# Altium PCB 683557.PCBDOC
Units mil, origin at the board's own origin, x right, y up, seen from the top; angles counter-clockwise.
Board outline 3090.55 x 1732.28 mil, 2 copper layers (Top Layer, Bottom Layer); 110 components, 0 nets, 218 pads, 47 vias.
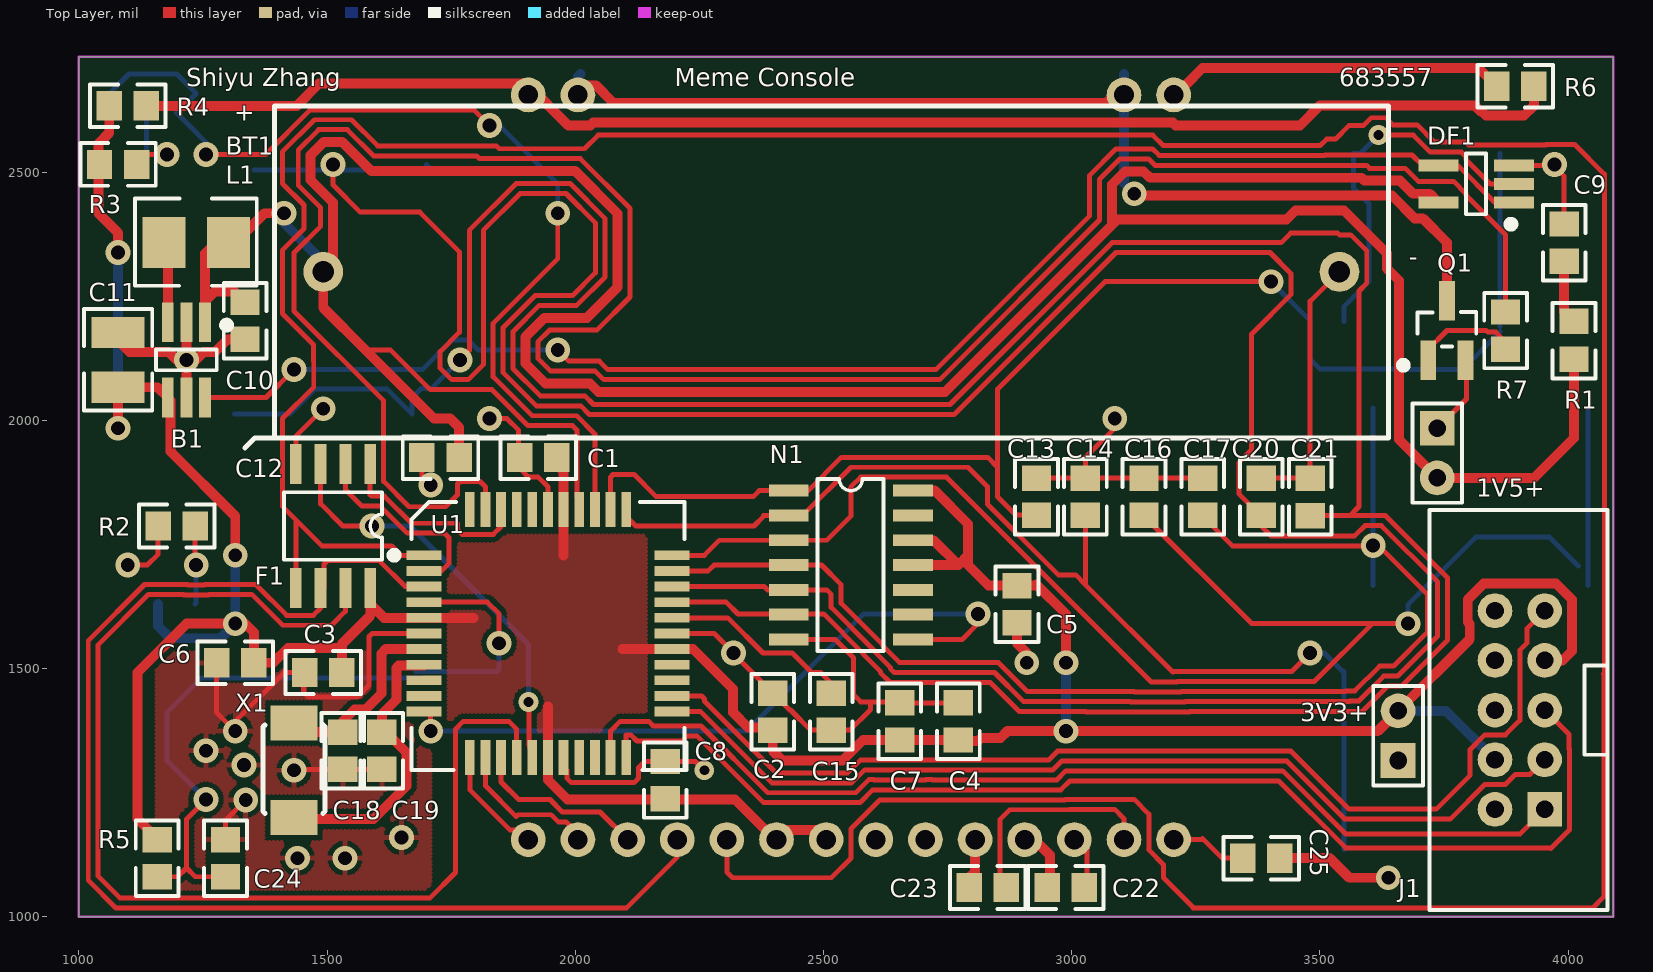
[diagram p0: Top Layer view]
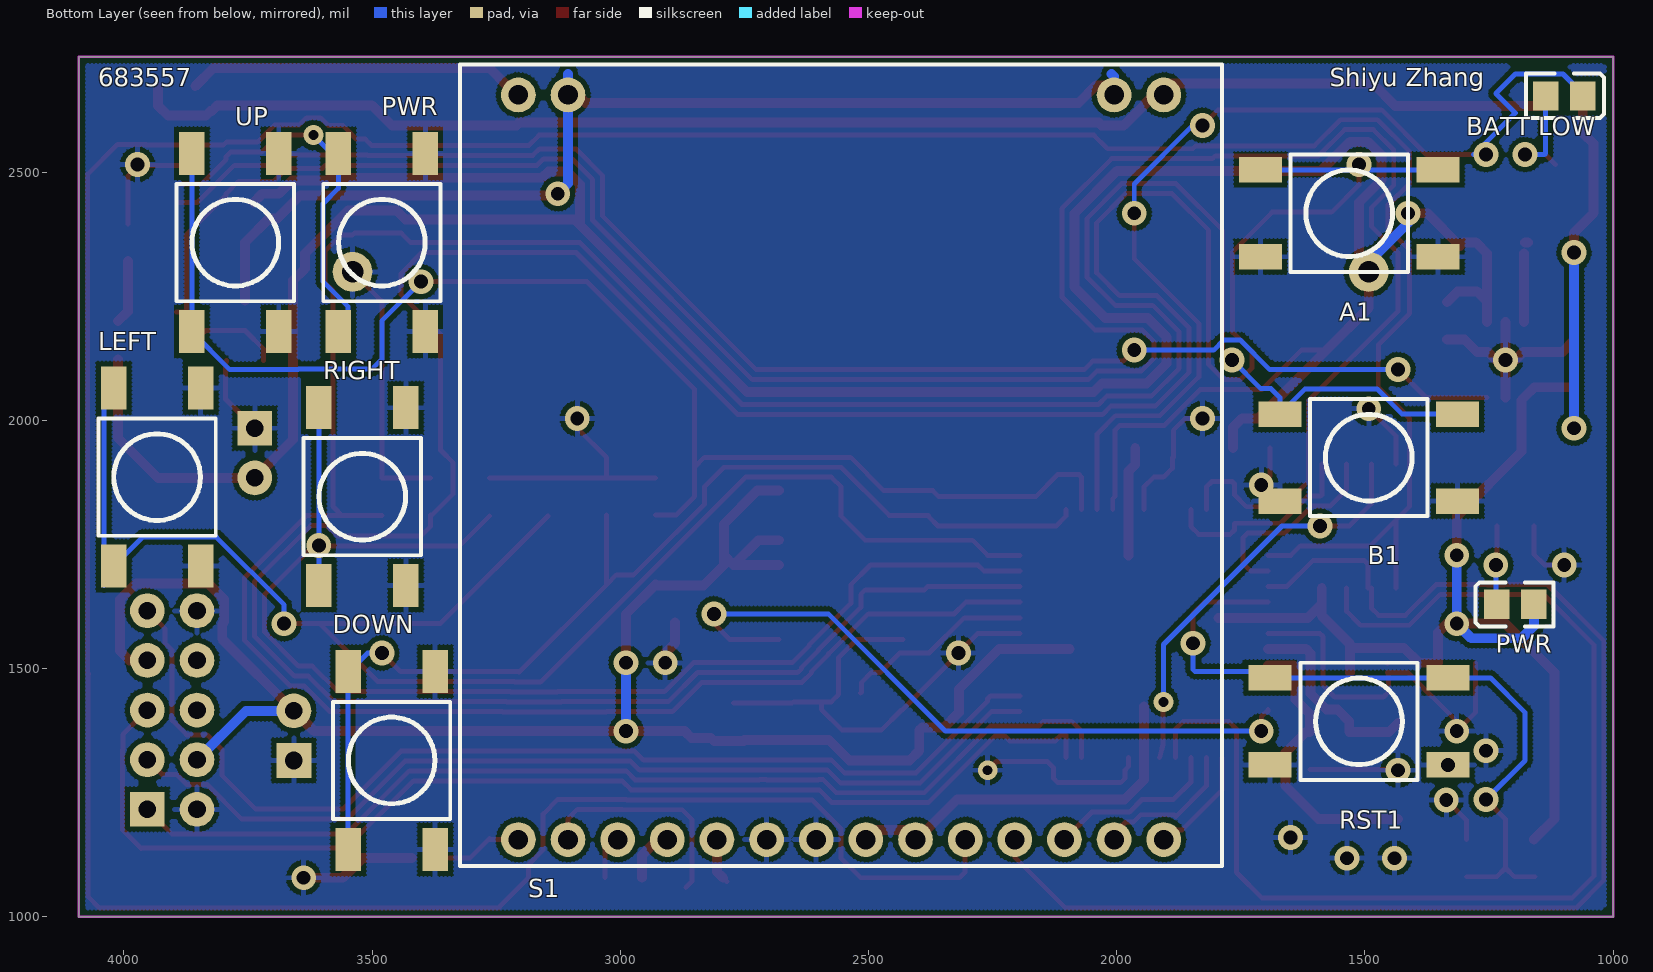
[diagram p1: Bottom Layer view, seen from below]

## Layer stack, top to bottom
Top Layer: signal copper 1.4
Dielectric: dielectric 12.6, FR-4, Dk 4.8
Bottom Layer: signal copper 1.4

## Board outline
1000,1000 4090.55,1000 4090.55,2732.28 1000,2732.28

## Components (designator, comment, footprint, x,y, rotation, side; value= is the part's Value field where it differs from the comment)
1V5+ "Func" HDR1X2 3736.22,1984.25 r270 top (schematic designator "VBATT Header1")
3V3+ "Func" HDR1X2 3657.48,1314.96 r90 top (schematic designator "VCC Header1")
A1 "A" SPNO_SMD 1531.5,2417.32 r180 bottom
B1 "SC120" SOT23-6 1216.54,2122.05 r270 top (schematic designator "Boost converter1")
B1 "B" SPNO_SMD 1492.13,1925.2 r180 bottom
"BATT LOW" "BAT_LOW_LED" 0805D 1098.43,2653.54 r0 bottom (schematic designator D2)
BT1 "1.5v" BATT_HOLDER 2515.75,2299.21 r180 top
C1 "100nF" 0805#1 1925.2,1925.2 r180 top
C2 "100nF" 0805#1 2397.64,1413.39 r90 top
C3 "100nF" 0805#1 1492.13,1492.13 r180 top
C4 "100nF" 0805#1 2771.65,1393.7 r90 top
C5 "100nF" 0805#1 2889.76,1629.92 r270 top
C6 "100nF" 0805#1 1314.96,1511.81 r180 top
C7 "100nF" 0805#1 2653.54,1393.7 r90 top
C8 "100nF" 0805#1 2181.1,1275.59 r90 top
C9 "100nF" 0805#1 3992.13,2358.27 r90 top
C10 "1uF" 0805#1 1334.65,2200.79 r270 top
C11 "22uF" 1210 1078.74,2122.05 r90 top
C12 "1uF" 0805#1 1728.35,1925.2 r180 top
C13 "100nF" 0805#1 2929.13,1846.46 r90 top
C14 "100nF" 0805#1 3027.56,1846.46 r90 top
C15 "100nF" 0805#1 2515.75,1413.39 r90 top
C16 "100nF" 0805#1 3145.67,1846.46 r90 top
C17 "100nF" 0805#1 3263.78,1846.46 r90 top
C18 "18pF" 0805#1 1531.5,1334.65 r270 top
C19 "18pF" 0805#1 1610.24,1334.65 r270 top
C20 "100nF" 0805#1 3381.89,1846.46 r90 top
C21 "100nF" 0805#2 3480.31,1846.46 r90 top
C22 "100nF" 0805#1 2988.19,1059.06 r0 top
C23 "100nF" 0805#1 2830.71,1059.06 r0 top
C24 "100nF" 0805#1 1295.28,1118.11 r90 top
C25 "100nF" 0805#1 3381.89,1118.11 r0 top
DF1 "74AUG1G80" SOT23-5 3814.96,2476.38 r180 top (schematic designator "D Flip Flop")
DOWN "DOWN" SPNO_SMD 3460.63,1314.96 r90 bottom (schematic designator DOWN1)
F1 "FM25L04B" SOIC-8 1511.81,1787.4 r270 top (schematic designator FRAM1)
J1 "JTAG" BOXEDVERT10 3952.76,1216.54 r90 top
L1 "4.7uH" 1210L 1236.22,2358.27 r0 top
LEFT "LEFT" SPNO_SMD 3933.07,1885.83 r90 bottom (schematic designator LEFT1)
N1 "74AHC30" SOIC-14 2555.12,1708.66 r0 top (schematic designator NAND1)
PWR "POWER LED" 0805D 1196.85,1629.92 r180 bottom (schematic designator D1)
PWR "Power button" SPNO_SMD 3480.32,2358.27 r90 bottom (schematic designator "Power button1")
Q1 "RTR025N03TL" SOT23 3755.91,2181.1 r90 top
R1 "10k" 0805#3 4011.81,2160.43 r270 top
R2 "220" 0805#1 1196.85,1787.4 r180 top
R3 "10k" 0805#1 1078.74,2515.75 r0 top
R4 "15k" 0805#1 1098.43,2633.86 r0 top
R5 "10k" 0805#1 1157.48,1118.11 r270 top
R6 "10k" 0805#1 3893.7,2673.23 r0 top
R7 "15" 0805#1 3874.02,2181.1 r90 top
RIGHT "RIGHT" SPNO_SMD 3519.68,1846.46 r90 bottom (schematic designator RIGHT1)
RST1 "RESET" SPNO_SMD 1511.81,1393.7 r180 bottom (schematic designator RESET_BTN1)
S1 "EA DOGS102x-6" "EA DOGS102x" 2555.28,1905.67 r0 bottom (schematic designator LCD)
U1 "ATMEGA16" QFP-48 1944.88,1570.87 r0 top
UP "UP" SPNO_SMD 3775.59,2358.27 r90 bottom (schematic designator UP1)
X1 "7.68Mhz" XTAL_FLAT_SMD 1433.07,1295.28 r270 top
? "" ? 0,0 r0 top
? "" ? 0,0 r0 top
? "" ? 0,0 r0 top
? "" ? 0,0 r0 top
? "" ? 0,0 r0 top
? "" ? 0,0 r0 top
? "" ? 0,0 r0 top
? "" ? 0,0 r0 top
? "" ? 0,0 r0 top
? "" ? 0,0 r0 top
? "" ? 0,0 r0 top
? "" ? 0,0 r0 top
? "" ? 0,0 r0 top
? "" ? 0,0 r0 top
? "" ? 0,0 r0 top
? "" ? 0,0 r0 top
? "" ? 0,0 r0 top
? "" ? 0,0 r0 top
? "" ? 0,0 r0 top
? "" ? 0,0 r0 top
? "" ? 0,0 r0 top
? "" ? 0,0 r0 top
? "" ? 0,0 r0 top
? "" ? 0,0 r0 top
? "" ? 0,0 r0 top
? "" ? 0,0 r0 top
? "" ? 0,0 r0 top
? "" ? 0,0 r0 top
? "" ? 0,0 r0 top
? "" ? 0,0 r0 top
? "" ? 0,0 r0 top
? "" ? 0,0 r0 top
? "" ? 0,0 r0 top
? "" ? 0,0 r0 top
? "" ? 0,0 r0 top
? "" ? 0,0 r0 top
? "" ? 0,0 r0 top
? "" ? 0,0 r0 top
? "" ? 0,0 r0 top
? "" ? 0,0 r0 top
? "" ? 0,0 r0 top
? "" ? 0,0 r0 top
? "" ? 0,0 r0 top
? "" ? 0,0 r0 top
? "" ? 0,0 r0 top
? "" ? 0,0 r0 top
? "" ? 0,0 r0 top
? "" ? 0,0 r0 top
? "" ? 0,0 r0 top
? "" ? 0,0 r0 top
? "" ? 0,0 r0 top
? "" ? 0,0 r0 top
? "" ? 0,0 r0 top
? "" ? 0,0 r0 top
? "" ? 0,0 r0 top

## Footprints (in the part's own frame and the unit in brackets; to place one, negate y for a bottom-side part, rotate by r counter-clockwise, add the part's x,y. Pads: shape width x height; smd on the part's side, far side on the other; paste and mask are expansions set on the pad)
0805#1 [mm] "0805 Footprint"
  rect 1.3x1.5 smd: 1(-0.95,0) 2(0.95,0)
  silkscreen extent -1.93,-1.09 1.93,1.09
0805#2 [mm] "0805 Footprint"
  rect 1.3x1.5 smd: 1(-0.975,-0.002) 2(0.95,0)
  silkscreen extent -1.93,-1.09 1.93,1.09
0805#3 [mm] "0805 Footprint"
  rect 1.3x1.5 smd: 1(0.953,0) 2(-1.006,0)
  silkscreen extent -1.93,-1.09 1.93,1.09
0805D [mm] "0805 Diode"
  rect 1.3x1.5 smd: A(0.95,0) K(-0.95,0)
  silkscreen extent -2.03,-1.14 1.95,1.12
1210 [mm]
  rect 1.6x2.7 smd: 1(-1.4,0) 2(1.4,0)
  silkscreen extent -2.6,-1.75 2.6,1.75
1210L [mm] "Precision Wire Wound Inductor, 2-Leads, Body 3.2x3.2mm, IPC Low Density"
  rect 2.2x2.6 smd: 1(-1.651,0) 2(1.651,0)
  silkscreen extent -3.12,-2.21 3.1,2.26
BATT_HOLDER [mil]
  round 80 hole 43.31: 1(1023.62,0) 2(-1023.62,0)
  silkscreen extent -1122,-335 1122,335
BOXEDVERT10 [mil] "IDC Header 2.54mm Boxed 10 pins"
  rect 70x70 hole 35.43: 1(0,0)
  round 70 hole 35.43: 2(0,100) 3(100,0) 4(100,100) 5(200,0) 6(200,100) 7(300,0) 8(300,100) 9(400,0) 10(400,100)
  silkscreen extent -203,-127 603,232
"EA DOGS102x" [mil] "graphics display footprint"
  round 70 hole 39.37: 1(-650,-750) 2(-550,-750) 13(550,-750) 14(650,-750) 15(650,750) 16(550,750) 17(450,750) 18(350,750) 19(250,750) 20(150,750) 21(50,750) 22(-50,750) 23(-150,750) 24(-250,750) 25(-350,750) 26(-450,750) 27(-550,750) 28(-650,750)
  silkscreen extent -768,-811 768,803
HDR1X2 [mil] "Connector; Header; 2 Position"
  rect 70x70 hole 35.43: 1(0,0)
  round 70 hole 35.43: 2(100,0)
  silkscreen extent -50,-50 150,50
QFP-48 [mm]
  rect 1.8x0.5 smd: 1(-6.35,4) 2(-6.35,3.2) 3(-6.35,2.4) 4(-6.35,1.6) 5(-6.35,0.8) 6(-6.35,0) 7(-6.35,-0.8) 8(-6.35,-1.6) 9(-6.35,-2.4) 10(-6.35,-3.2) 11(-6.35,-4) 23(6.35,-4) 24(6.35,-3.2) 25(6.35,-2.4) 26(6.35,-1.6) 27(6.35,-0.8) 28(6.35,0) 29(6.35,0.8) 30(6.35,1.6) 31(6.35,2.4) 32(6.35,3.2) 33(6.35,4)
  rect 0.5x1.8 smd: 12(-4,-6.35) 13(-3.2,-6.35) 14(-2.4,-6.35) 15(-1.6,-6.35) 16(-0.8,-6.35) 17(0,-6.35) 18(0.8,-6.35) 19(1.6,-6.35) 20(2.4,-6.35) 21(3.2,-6.35) 22(4,-6.35) 34(4,6.35) 35(3.2,6.35) 36(2.4,6.35) 37(1.6,6.35) 38(0.8,6.35) 39(0,6.35) 40(-0.8,6.35) 41(-1.6,6.35) 42(-2.4,6.35) 43(-3.2,6.35) 44(-4,6.35)
  silkscreen extent -8,-6.98 6.98,6.73
SOIC-8 [mil] "SOIC-8 Footprint"
  rect 80x24 smd: 1(-125,75) 2(-125,25) 3(-125,-25) 4(-125,-75) 5(125,-75) 6(125,-25) 7(125,25) 8(125,75)
  silkscreen extent -68,-98 68,98
SOIC-14 [mil] "SOIC-14 Footprint"
  rect 80x24 smd: 1(-125,150) 2(-125,100) 3(-125,50) 4(-125,0) 5(-125,-50) 6(-125,-100) 7(-125,-150)
  rect 80x24.02 smd: 8(125,-150) 9(125,-100) 10(125,-50) 11(125,0) 12(125,50) 13(125,100) 14(125,150)
  silkscreen extent -67,-173 66,173
SOT23 [mil] "SOT23, 3-Leads, Body 3.0x2.5mm (max), Pitch 0.95mm, IPC Low Density"
  rect 80.24x31.5 smd: 1(-60,37.4)
  rect 80x31.5 smd: 2(-60,-37.4) 3(60,0)
  silkscreen extent -75,-59 37,93
SOT23-5 [mm]
  rect 2.032x0.6 smd: 1(-1.929,0.95) 2(-1.929,0) 3(-1.929,-0.95) 4(1.929,-0.95) 5(1.929,0.95)
  silkscreen extent -1.9,-1.55 0.53,2.18
SOT23-6 [mm]
  rect 2.032x0.6 smd: 1(-1.929,0.95) 2(-1.929,0) 3(-1.929,-0.95) 4(1.929,-0.95) 5(1.929,0) 6(1.929,0.95)
  silkscreen extent -1.9,-1.55 0.53,2.18
SPNO_SMD [mm] "SP NO SMD Tactile switch"
  rect 2.2x1.3 smd: 1(-4.55,-2.225) 2(4.55,-2.225) 3(-4.55,2.225) 4(4.55,2.225)
  silkscreen extent -3,-3 3,3
XTAL_FLAT_SMD [mm]
  rect 1.8x2.4 smd: 1(-2.412,0) 2(2.413,0)
  silkscreen extent -2.33,-1.59 2.21,1.6
? [mil]

## Part data
1V5+ 3V3+: library part HDR2, "2 Pin Header"
A1 B1 DOWN LEFT PWR RIGHT RST1 UP: library part SW-PB, "Push Button Switch"
B1: "Regulator Low Voltage"
"BATT LOW": library part "LED RED", "Light Emitting Diode"
BT1: library part BAT, "Battery Holder AA 1.5v"
C1 C2 C3 C4 C5 C6 C7 C8 C9 C10 C12 C13 C14 C15 C16 C17 C18 C19 C20 C21 C22 C23 C24 C25: library part "C 0805", "Capacitor 100nF"
C11: library part "C 1210", "Capacitor 22uF"
DF1: "Inverted single D flip flop"
F1: "FRAM 4Kb Memory"
J1: library part JTAG_CON, "JTAG ATMEL connector"
L1: library part "I 1210", "Inductor 4.7uH"
N1: "1 x 8 Input NAND gate"
PWR: library part "LED GREEN", "Light Emitting Diode"
Q1: library part MOSFET-N, "N-Channel MOSFET"
R1 R2 R3 R4 R5 R6 R7: library part R, "Resistor"
S1: "LCD 102x64-pixel with backlight"
U1: "ATMEGA16 Microcontroller"
X1: library part XTAL, "Crystal Oscillator"

## Via types
v1: diameter 50, hole 28, Top Layer to Bottom Layer, tented both sides, 44 vias
v2: diameter 40, hole 20, Top Layer to Bottom Layer, tented both sides, 3 vias

## Nets (pads, with @x,y where several pads share a name; then routed paths per layer and width w, separated by ;. In a path a pad name is that pad's centre, name@x,y a point inside that pad or via, vN(x,y) a via of type N, cw(c..) or ccw(c..) an arc to the next point about the centre after c; other vN are vias at no path point)
pads on no net: 1V5+.1 1V5+.2 3V3+.1 3V3+.2 "BATT LOW.A" "BATT LOW.K" A1.1 A1.2 A1.3 A1.4 B1.1 B1.2 B1.3 B1.4 B1.5 B1.6 BT1.1 BT1.2 C1.1 C1.2 C2.1 C2.2 C3.1 C3.2 C4.1 C4.2 C5.1 C5.2 C6.1 C6.2 C7.1 C7.2 C8.1 C8.2 C9.1 C9.2 C10.1 C10.2 C11.1 C11.2 C12.1 C12.2 C13.1 C13.2 C14.1 C14.2 C15.1 C15.2 C16.1 C16.2 C17.1 C17.2 C18.1 C18.2 C19.1 C19.2 C20.1 C20.2 C21.1 C21.2 C22.1 C22.2 C23.1 C23.2 C24.1 C24.2 C25.1 C25.2 DF1.1 DF1.2 DF1.3 DF1.4 DF1.5 DOWN.1 DOWN.2 DOWN.3 DOWN.4 F1.1 F1.2 F1.3 F1.4 F1.5 F1.6 F1.7 F1.8 J1.1 J1.2 J1.3 J1.4 J1.5 J1.6 J1.7 J1.8 J1.9 J1.10 L1.1 L1.2 LEFT.1 LEFT.2 LEFT.3 LEFT.4 N1.1 N1.2 N1.3 N1.4 N1.5 N1.6 N1.7 N1.8 N1.9 N1.10 N1.11 N1.12 N1.13 N1.14 PWR.1 PWR.2 PWR.3 PWR.4 PWR.A PWR.K Q1.1 Q1.2 Q1.3 R1.1 R1.2 R2.1 R2.2 R3.1 R3.2 R4.1 R4.2 R5.1 R5.2 R6.1 R6.2 R7.1 R7.2 RIGHT.1 RIGHT.2 RIGHT.3 RIGHT.4 RST1.1 RST1.2 RST1.3 RST1.4 S1.1 S1.2 S1.13 S1.14 S1.15 S1.16 S1.17 S1.18 S1.19 S1.20 S1.21 S1.22 S1.23 S1.24 S1.25 S1.26 S1.27 S1.28 U1.1 U1.2 U1.3 U1.4 U1.5 U1.6 U1.7 U1.8 U1.9 U1.10 U1.11 U1.12 U1.13 U1.14 U1.15 U1.16 U1.17 U1.18 U1.19 U1.20 U1.21 U1.22 U1.23 U1.24 U1.25 U1.26 U1.27 U1.28 U1.29 U1.30 U1.31 U1.32 U1.33 U1.34 U1.35 U1.36 U1.37 U1.38 U1.39 U1.40 U1.41 U1.42 U1.43 U1.44 UP.1 UP.2 UP.3 UP.4 X1.1 X1.2
copper on no net: | length 89453.7
  Top Layer w10: v1(1098.43,1708.66) 1137.8,1708.66 1159.45,1730.32 1159.45,1787.4 ; 1116.14,2515.75 1135.82,2535.43 v1(1177.16,2535.43) ; 1157.48,1080.71 1198.82,1080.71 1216.54,1098.43 ; 1234.25,1787.4 1234.25,1710.63 v1(1236.22,1708.66) ; 1253.94,2046.12 1376.83,2046.12 v1(1433.07,2102.36) ; v1(1255.91,1236.22) 1216.54,1196.85 1216.54,1098.43 ; v1(1255.9,2535.43) 1375.93,2535.43 1466.25,2625.75 1795.51,2625.75 v1(1826.77,2594.49) ; 1277.56,1511.81 1277.56,1411.42 v1(1314.96,1374.02) 1314.96,1393.7 1413.39,1492.13 1454.72,1492.13 1452.76,1490.16 1452.76,1452.76 1462.6,1442.91 1561.02,1442.91 1584.45,1466.34 1584.45,1564.76 1590.55,1570.87 1694.88,1570.87 ; 1295.28,1080.71 1234.25,1080.71 1216.54,1098.43 ; 1295.28,1155.51 1295.28,1194.82 v1(1336,1235.54) ; v1(1433.07,1295.28) 1435.04,1297.24 1531.5,1297.24 1610.24,1297.24 ; 1436.81,1662.4 1436.81,1799.82 ; 1436.81,1912.4 1436.81,1968.31 v1(1492.13,2023.62) ; 1454.72,1510.28 1454.72,1511.81 ; 1486.81,1912.4 1486.81,1832.09 1531.5,1787.4 v1(1590.55,1787.4) ; v1(1511.81,2515.75) 1511.81,2474.46 1566.81,2419.46 1686.84,2419.46 1766.46,2339.84 1766.46,2177.36 1727.71,2138.61 1727.71,2105.48 1751.15,2082.05 1784.28,2082.05 1814.57,2112.33 1814.57,2382.95 1888.94,2457.32 1981.14,2457.32 2040.19,2398.27 2040.19,2297.32 1994.6,2251.73 1919,2251.73 1854.57,2187.3 1854.57,2096.17 1921.33,2029.41 2010.97,2029.41 2028.33,2012.05 2763.13,2012.05 3089.36,2338.27 3399.4,2338.27 3441.57,2296.09 3441.57,2253.32 3362.2,2173.95 3362.2,1940.5 3337.36,1915.66 3337.36,1851.61 3381.89,1807.09 ; 1536.81,1662.4 1536.81,1615.55 1513.12,1591.86 1508.66,1587.4 1410.31,1587.4 1348.11,1649.61 1262.02,1649.61 1261.07,1648.66 1211.37,1648.66 1210.42,1649.61 1140.28,1649.61 1038.74,1548.06 1038.74,1081.86 1083.1,1037.5 1706.79,1037.5 1758.51,1089.21 1758.51,1378.14 1774.06,1393.7 1866.14,1393.7 1881.89,1377.95 1881.89,1320.87 ; 1536.81,1912.4 1536.81,1860.83 1570.24,1827.4 1607.12,1827.4 1661.64,1772.87 1736.53,1772.87 1745.31,1764.09 1745.31,1711.38 1730.79,1696.85 1694.88,1696.85 ; 1577.5,2141.73 1628.03,2141.73 1707.71,2062.05 1832.12,2062.05 1904.76,1989.41 1994.4,1989.41 2003.19,1980.62 2003.19,1847.2 2007.87,1842.52 2007.87,1820.87 ; 1586.81,1912.4 1586.81,1850.2 1589.61,1847.4 1615.4,1847.4 1669.93,1792.87 1762.56,1792.87 1762.56,1779.22 1771.35,1770.43 1834.95,1770.43 1850.39,1785.87 1850.39,1820.87 ; 1690.94,1944.88 1690.94,1887.8 v1(1708.66,1870.08) ; 1694.88,1413.39 1694.88,1417.32 1708.66,1403.54 v1(1708.66,1374.02) v1@1708.66,1393.7 ; 1694.88,1633.86 1822.83,1633.86 1846.46,1610.24 v1(1846.46,1551.18) ; 1694.88,1665.35 1657.07,1665.35 1605.02,1717.4 1500.87,1717.4 1493.81,1710.35 1493.81,1662.4 1486.81,1662.4 1486.81,1622.05 1472.16,1607.4 1418.6,1607.4 1356.39,1669.61 1253.73,1669.61 1252.79,1668.66 1219.65,1668.66 1218.71,1669.61 1132,1669.61 1018.74,1556.35 1018.74,1073.57 1074.81,1017.5 2102.78,1017.5 2205.12,1119.84 2205.12,1175.2 ; 1694.88,1728.35 1648.97,1728.35 1629.92,1747.4 1489.23,1747.4 1436.81,1799.82 ; v1(1767.71,2122.05) 1786.46,2140.79 1786.46,2383.12 1880.66,2477.32 1989.42,2477.32 2060.19,2406.55 2060.19,2289.04 2002.88,2231.73 1927.29,2231.73 1874.57,2179.01 1874.57,2104.45 1929.61,2049.41 2019.25,2049.41 2036.62,2032.05 2754.85,2032.05 3081.07,2358.27 3421.89,2358.27 3440.94,2377.33 3535.94,2377.33 3539.37,2373.9 3562.15,2373.9 3594.37,2341.68 3594.37,2276.43 3578.74,2260.8 3578.74,1826.77 3560.02,1808.06 3480.39,1808.06 ; 1787.4,1320.87 1787.4,1255.91 1868.11,1175.2 1905.12,1175.2 ; 1818.9,1320.87 1818.9,1263.78 1880.79,1201.89 1884.57,1205.67 1951.16,1205.67 1965.61,1191.22 1981.28,1191.22 1997.31,1175.2 2005.12,1175.2 ; 1818.9,1820.87 1818.9,1866.14 1808,1877.04 1767.72,1877.04 1762.56,1871.88 1762.56,1850.09 1738.62,1826.14 1664.95,1826.14 1613.81,1877.28 1613.81,2039.73 1433.39,2220.16 1433.39,2337.94 1486.81,2391.36 1486.81,2428.75 1441.81,2473.75 1441.81,2544.74 1482.82,2585.75 1540.81,2585.75 1593.53,2533.03 1801.38,2533.03 1807.09,2527.32 2010.13,2527.32 2110.19,2427.26 2110.19,2248.62 2043.31,2181.73 1948,2181.73 1924.57,2158.3 1924.57,2125.16 1950.32,2099.41 2039.97,2099.41 2057.33,2082.05 2734.14,2082.05 3055.98,2403.89 3055.98,2485.69 3096.99,2526.69 3154.98,2526.69 3167.77,2513.9 3594.15,2513.9 3600.05,2508 3671.79,2508 3698.09,2481.69 3769.34,2481.69 3794.03,2457 3794.03,2454.02 3874.02,2374.04 3874.02,2218.5 3893.7,2218.5 ; v1(1827.21,2003.94) 1861.95,2003.94 1885.83,1980.06 1885.83,1925.2 ; 1850.39,1320.87 1850.39,1271.65 1885.83,1236.22 1948.9,1236.22 1973.9,1211.22 2049.72,1211.22 2105.28,1155.67 ; 1887.8,1925.2 1887.8,1903.54 1905.51,1885.83 1925.2,1885.83 1944.88,1866.14 1944.88,1820.87 ; v2(1905.51,1433.07) 1906.73,1431.85 1906.73,1347.2 1913.39,1320.87 ; v1(1964.57,2141.73) 1986.89,2119.41 2048.25,2119.41 2065.3,2102.36 2726.17,2102.36 3035.98,2412.18 3035.98,2493.97 3088.71,2546.69 3163.26,2546.69 3176.06,2533.9 3508.98,2533.9 3509.88,2534.8 3685.44,2534.8 3706.46,2513.78 3739.03,2513.78 3777.56,2513.78 3852.36,2438.98 3890.89,2438.98 ; v1(1964.57,2417.32) 1964.57,2325.58 1834.57,2195.58 1834.57,2087.88 1913.04,2009.41 2002.69,2009.41 2039.37,1972.73 2039.37,1820.87 ; 1976.38,1320.87 1976.38,1302.35 1983.03,1295.69 1983.03,1279.22 1991.82,1270.43 2118.42,1270.43 2127.2,1279.22 2127.2,1300.43 2139.76,1312.99 2181.1,1312.99 2242.13,1312.99 v2(2259.84,1295.28) ; 2070.87,1320.87 2070.87,1374.02 2090.55,1393.7 2148.08,1393.7 2157.3,1384.48 2253.18,1384.48 2387.71,1249.96 2565.05,1249.96 2591.31,1276.22 2600.72,1276.22 2601.23,1275.71 2705.85,1275.71 2706.36,1276.22 2718.83,1276.22 2719.34,1275.71 2969.88,1275.71 2988.19,1294.02 3425.01,1294.02 3552.49,1166.54 3902.76,1166.54 3952.76,1216.54 ; 2070.87,1820.87 2070.87,1885.83 2076.02,1890.98 2118.42,1890.98 2162.94,1846.46 2358.27,1846.46 2370.47,1858.66 2430.12,1858.66 2468.9,1858.66 2535.91,1925.67 2830.55,1925.67 2850.39,1905.83 ; 2102.36,1320.87 2102.36,1366.61 2111.81,1366.61 2124.09,1354.33 2215.48,1354.33 2225.63,1364.48 2244.9,1364.48 2379.42,1229.96 2573.33,1229.96 2599.08,1255.71 2978.17,1255.71 2996.47,1274.02 3416.72,1274.02 3551.7,1139.04 3963.99,1139.04 3965.23,1137.8 4002.76,1175.32 4002.76,1337.25 4001.97,1338.03 4001.97,1367.32 3952.76,1416.54 ; 2102.36,1820.87 2102.36,1807.09 2122.05,1787.4 2359.84,1787.4 2379.53,1807.09 ; 2194.88,1413.38 2252.57,1413.38 2395.99,1269.96 2556.77,1269.96 2583.03,1296.22 2609.01,1296.22 2609.52,1295.71 2697.57,1295.71 2698.08,1296.22 2727.12,1296.22 2727.63,1295.71 2961.6,1295.71 2979.9,1314.02 3433.29,1314.02 3550.46,1196.85 3762.36,1196.85 3832.05,1266.54 3873.47,1266.54 3893.7,1286.77 3922.99,1286.77 3952.76,1316.54 ; 2194.88,1444.88 2254.14,1444.88 2260.16,1438.87 2260.16,1434.08 2404.27,1289.96 2548.48,1289.96 2574.74,1316.22 2617.29,1316.22 2617.8,1315.71 2689.28,1315.71 2689.8,1316.22 2735.4,1316.22 2735.91,1315.71 2953.31,1315.71 2971.62,1334.02 3441.57,1334.02 3558.74,1216.85 3734.08,1216.85 3802.76,1285.53 3802.76,1337.25 3832.05,1366.54 3873.47,1366.54 3902.76,1395.82 3902.76,1537.25 3917.4,1551.89 3917.4,1581.18 3952.76,1616.54 ; 2194.88,1570.87 2279.53,1570.87 v1(2318.9,1531.5) 2318.9,1529.53 2397.64,1450.79 2431.85,1416.57 2433.38,1416.57 2473.97,1375.98 2515.75,1375.98 2553.15,1375.98 2594.49,1417.32 2594.49,1433.07 ; 2194.88,1602.36 2307.09,1602.36 2377.95,1531.5 2437.01,1531.5 2476.38,1492.13 2494.09,1492.13 2513.78,1472.44 2513.78,1452.76 2515.75,1450.79 ; 2194.88,1633.86 2303.87,1633.86 2327.81,1609.92 2386.45,1609.92 2386.76,1610.24 2500.28,1610.24 2580.28,1530.25 2580.28,1528.71 2614.49,1494.5 2614.49,1491.81 2634.17,1472.13 2836,1472.13 2894.74,1413.39 2970.99,1413.39 2971.62,1414.02 3027.56,1414.02 3028.5,1413.07 3236.92,1413.07 3237.86,1414.02 3585.82,1414.02 3636.77,1464.96 3664.71,1464.96 3757.17,1557.41 3757.17,1683 3632.14,1808.03 3500.39,1808.03 ; 2194.88,1665.35 2380.32,1665.35 2387.01,1658.66 2430.12,1658.66 2506.38,1658.66 2515.43,1649.61 2515.43,1623.37 2600.28,1538.53 2600.28,1537 2634.49,1502.79 2634.49,1500.1 2642.46,1492.13 2844.28,1492.13 2902.39,1434.02 3117.7,1434.02 3118.64,1433.07 3228.63,1433.07 3229.58,1434.02 3560,1434.02 ; 2194.88,1696.85 2267.72,1696.85 2279.53,1708.66 2430.12,1708.66 2496.06,1708.66 2535.43,1669.29 2535.43,1631.66 2620.28,1546.81 2620.28,1545.28 2653.43,1512.13 2852.57,1512.13 2910.68,1454.02 3125.98,1454.02 3126.93,1453.07 3220.35,1453.07 3221.29,1454.02 3550.49,1454.02 3551.72,1455.24 3570.48,1455.24 3620.2,1504.96 3648.14,1504.96 3717.17,1573.98 3717.17,1648.98 3618.68,1747.46 3323.4,1747.46 3263.78,1807.09 ; 2194.88,1728.35 2259.84,1728.35 2290.16,1758.66 2430.12,1758.66 2506.69,1758.66 2555.12,1807.09 2555.12,1866.14 2574.65,1885.67 2747.75,1885.67 3160.35,1473.07 3212.06,1473.07 3213.01,1474.02 3488.6,1474.02 3605.13,1590.55 ; 2305.12,1175.2 2305.12,1090.33 2316.71,1078.74 2515.75,1078.74 2555.28,1118.27 2555.28,1177.32 2613.66,1235.71 2986.45,1235.71 2987.28,1236.54 3125.67,1236.54 3155.28,1206.93 3155.28,1134.96 3185.04,1105.19 3185.04,1078.74 3244.09,1019.69 3244.09,1017.5 4049,1017.5 4072.13,1040.63 4072.13,1488.11 4071.18,1489.06 4073.05,1490.93 4073.05,2496.06 4013.37,2555.74 3955.87,2555.74 3955.24,2555.12 3799,2555.12 3793.53,2560.59 3730.75,2560.59 3696,2595.34 3647.07,2595.34 3632.61,2609.8 3603.61,2609.8 3588.3,2594.49 3559.06,2594.49 3531.26,2566.69 3513.49,2566.69 3500.7,2553.9 3184.34,2553.9 3163.44,2574.8 2045.89,2574.8 2018.41,2547.32 1846.46,2547.32 1840.75,2553.03 1601.81,2553.03 1549.09,2605.75 1474.53,2605.75 1409.81,2541.03 1409.81,2477.46 1453.38,2433.89 1453.38,2386.22 1409.81,2342.65 1409.81,2215.45 1472.44,2152.82 1472.44,2120.19 1473.07,2119.56 1473.07,2067.2 1409.81,2003.94 1409.81,1826.82 1436.81,1799.82 ; 2379.53,1808.66 2430.12,1808.66 2458.27,1808.66 2555.28,1905.67 2791.18,1905.67 2830.39,1866.46 2830.39,1831.46 2949.53,1712.32 2949.74,1712.32 2973.09,1688.98 3007.87,1688.98 3027.56,1669.29 ; 2430.12,1558.66 2523.58,1558.66 2560.28,1521.96 2560.28,1447.6 2574.8,1433.07 2594.49,1433.07 ; 2680.12,1558.66 2779.13,1558.66 2811.02,1590.55 v1(2811.02,1610.24) ; 2771.65,1431.1 2653.54,1431.1 2651.57,1433.07 2594.49,1433.07 ; 2785.43,1070.87 2793.31,1078.74 ; 2868.11,1059.06 2855.12,1072.05 2855.12,1134.8 2855.28,1134.96 2855.28,1176.38 2855.12,1176.54 2855.12,1195.91 2874.92,1215.71 2994.73,1215.71 2995.56,1216.54 3086.61,1216.54 3105.12,1198.03 3105.12,1175.2 ; 2929.13,1809.06 2887.8,1809.06 2850.39,1846.46 2850.39,1905.83 ; 2929.13,1883.86 3027.56,1883.86 ; 3005.12,1175.2 3030.71,1149.61 3030.71,1078.74 ; 3027.56,1809.06 3027.56,1669.29 ; v1(3086.61,2003.94) 3086.61,1984.25 3027.56,1925.2 3027.56,1883.86 ; 3145.67,1807.53 3362.42,1590.77 3401.8,1590.77 ; 3205.28,1155.67 3261.97,1155.67 3263.78,1157.48 3303.15,1118.11 3344.49,1118.11 ; 3263.78,1883.86 3145.67,1883.86 3027.56,1883.86 ; 3381.89,1809.06 3381.89,1807.09 ; 3381.89,1883.86 3480.31,1883.86 3480.31,2240.16 3559.06,2318.9 ; v1(3401.57,2279.53) 3066.93,2279.53 2850.39,2062.99 2850.39,1905.83 ; 3402.02,1590.55 3605.13,1590.55 ; v1(3480.31,1531.49) 3442.83,1494.02 3204.72,1494.02 3203.78,1493.07 3027.56,1669.29 ; 3560,1435.24 3578.77,1435.24 3628.49,1484.96 3656.43,1484.96 3737.17,1565.7 3737.17,1674.72 3623.85,1788.03 3590.72,1788.03 3570.15,1767.46 3401.57,1767.46 3381.89,1787.15 3381.89,1807.09 ; v1@3606.72,1747.46 v1(3607.28,1748.03) ; v2(3618.11,2574.8) 3688.25,2574.8 3722.46,2540.59 3785.24,2540.59 3794.03,2531.8 3794.03,2525.59 3843.24,2476.38 3890.89,2476.38 ; v1(3677.17,1590.55) 3605.13,1590.55 ; 3718.5,2121.1 3718.5,2143.7 3755.91,2181.1 3814.96,2181.1 3835.09,2181.1 3838.27,2177.91 3854.33,2177.91 3872.49,2159.76 3872.49,2143.7 ; 3736.22,1984.25 3795.28,2043.31 3795.28,2116.85 3793.31,2118.82 3793.31,2121.1 ; 3890.89,2513.78 3970.47,2513.78 3992.13,2492.13 3992.13,2395.67
  Top Layer w20: 1061.02,2633.86 1061.02,2579.47 1039.37,2557.81 1039.37,2417.32 1078.74,2377.95 v1(1078.74,2338.58) ; v1(1078.74,1984.25) 1078.74,2066.93 1158.32,2066.93 1179.13,2046.12 1184.72,2040.53 1184.72,1937.32 1314.96,1807.09 v1(1314.96,1728.35) ; 1078.74,2177.17 1078.74,2161.42 1102.18,2137.98 1180.92,2137.98 v1@1216.54,2102.36 ; 1135.83,2633.86 1439,2633.86 1483.69,2678.54 1901.77,2678.54 1905.12,2675.2 1985.83,2594.49 2030.22,2594.49 2035.54,2599.8 3203.99,2599.8 3209.31,2594.49 3459.68,2594.49 3500,2634.8 3811.32,2634.8 3822.42,2623.7 3825.12,2623.7 3834.65,2614.17 3911.42,2614.17 3931.1,2633.86 3931.1,2673.23 ; 1159.77,1155.51 1118.11,1197.17 1118.11,1492.13 1216.54,1590.55 v1(1314.96,1590.55) 1334.65,1590.55 1352.36,1572.83 1352.36,1511.81 1391.01,1511.81 1420.85,1541.65 1529.53,1541.65 ; 1171.22,2358.27 1177.17,2358.27 ; 1179.13,2197.98 1179.13,2336.61 ; 1216.54,2046.12 v1@1216.54,2102.36 ; 1216.54,2197.98 v1@1216.54,2102.36 ; 1253.94,2197.98 1253.94,2240.16 ; 1301.22,2358.27 1275.59,2358.27 1253.94,2336.61 1253.94,2240.16 ; 1308.09,2351.4 1374.01,2417.32 v1(1413.38,2417.32) ; 1334.65,2163.39 1299.44,2163.39 1274.03,2137.98 1252.15,2137.98 v1@1216.54,2102.36 ; 1334.65,2238.19 1312.99,2259.84 1273.62,2259.84 1253.94,2240.16 ; 1433.07,1196.85 1593.24,1196.85 1659.76,1263.37 1659.76,1331.12 1618.84,1372.05 1610.24,1372.05 1610.24,1408.36 1639.45,1437.57 1639.45,1501.65 1644.01,1506.22 1694.44,1506.22 1694.88,1506.66 ; 1433.07,1390.26 1451.28,1372.05 1531.5,1372.05 1531.5,1393.7 1555.43,1417.64 1577.09,1417.64 1609.45,1450 1609.45,1530.71 1618.11,1539.37 1694.88,1539.37 ; 1529.53,1492.13 1529.53,1549.21 1586.81,1606.5 1586.81,1662.4 1586.81,1629.92 1614.37,1602.36 1694.88,1602.36 1795.28,1602.36 ; 1765.75,1944.88 1765.75,1986.22 1748.03,2003.94 1715.29,2003.94 1577.5,2141.73 1492.13,2227.1 1492.13,2297.11 1511.81,2316.8 1511.81,2439.11 1466.81,2484.11 1466.81,2534.39 1493.17,2560.75 1530.45,2560.75 1588.88,2502.32 1999.77,2502.32 2085.19,2416.91 2085.19,2268.3 2023.62,2206.73 1937.64,2206.73 1899.57,2168.66 1899.57,2114.81 1939.97,2074.41 2029.61,2074.41 2046.97,2057.05 2744.5,2057.05 3080.98,2393.54 ; 1944.88,1424 1944.88,1320.87 1944.88,1275.59 1984.25,1236.22 2321.88,1236.22 2382.9,1175.2 2505.12,1175.2 ; 1962.6,1944.88 1962.6,1911.42 1976.38,1897.64 1976.38,1820.87 1976.38,1727.87 ; 2005.12,2675.2 2041.34,2675.2 2076.73,2639.8 3069.72,2639.8 3105.12,2675.2 ; 2094.49,1539.37 2194.88,1539.37 2236.95,1539.37 2317.55,1458.76 2317.55,1412.04 2348.11,1381.48 2392.14,1381.48 2397.64,1375.98 2397.64,1334.65 2417.32,1314.96 2538.13,1314.96 2579.47,1356.3 2653.54,1356.3 2750,1356.3 2751.97,1354.33 2810.66,1354.33 2816.92,1360.59 2856.65,1360.59 2870.08,1374.02 v1(2988.19,1374.02) 3616.54,1374.02 3657.48,1414.96 3801.85,1559.33 3801.85,1589.66 3797.76,1593.75 3797.76,1639.32 3829.97,1671.54 3975.54,1671.54 4007.76,1639.32 4007.76,1535.55 3988.74,1516.54 3952.76,1516.54 ; 2680.12,1708.66 2771.65,1708.66 ; 2680.12,1758.66 2721.65,1758.66 2771.65,1708.66 ; 2680.12,1858.66 2724.09,1858.66 2791.34,1791.42 2791.34,1728.35 ; 2793.31,1078.74 2805.12,1090.55 2805.12,1175.2 ; 2889.76,1592.52 2889.76,1551.18 2909.45,1531.5 v1(2909.45,1511.81) ; 2905.12,1175.2 2955.91,1124.41 2955.91,1078.74 ; v1(2988.18,1511.81) 2988.18,1609.88 2928.95,1669.11 2927.17,1667.32 2889.76,1667.32 2832.68,1667.32 2791.34,1708.66 2791.34,1728.35 ; v1(3125.98,2456.69) 3129.68,2453 3644.91,2453 3690.75,2407.17 3707.01,2407.17 3755.91,2358.27 3755.91,2241.1 ; 3205.12,2675.2 3229.19,2675.2 3263.78,2709.78 3819.74,2709.78 3856.3,2673.23 ; 3419.29,1118.11 3519.69,1118.11 3559.06,1078.74 v1(3637.8,1078.74) ; 3739.03,2438.98 3721.32,2456.69 3687.48,2456.69 3661.17,2483 3589.7,2483 3583.8,2488.9 3157.42,2488.9 3144.62,2501.69 3107.34,2501.69 3080.98,2475.33 3080.98,2393.54 ; 3992.13,2320.87 3992.13,2219.72 4011.81,2200.03 ; 4011.81,2122.91 4011.81,1964.57 3931.5,1884.25 3736.22,1884.25 3659.06,1961.42 3659.06,2281.97 3635.31,2305.71 3635.31,2336.1 3548.77,2422.64 3450.9,2422.64 3432.93,2404.67 3092.11,2404.67 3080.98,2393.54 ; 2771.65,1708.66 2791.34,1728.35
  Bottom Layer w10: 1061.02,2653.54 1061.02,2658.26 1100.84,2698.07 1196.85,2698.07 1236.22,2658.7 1196.85,2619.33 1280.75,2535.43 v1(1255.9,2535.43) ; 1135.83,2653.54 1135.83,2537.4 1137.8,2535.43 v1(1177.16,2535.43) ; 1234.25,1629.92 1236.22,1631.89 v1(1236.22,1708.66) ; v1(1255.91,1236.22) 1177.17,1314.96 1177.17,1411.42 1247.05,1481.3 1332.68,1481.3 1690.94,1481.3 ; 1312.99,2012.8 1424.73,2012.8 1475.56,2063.62 1508.69,2063.62 1509.32,2062.99 1621.06,2062.99 1671.26,2012.8 1671.26,2046.28 1688.98,2064 1709.67,2064 v1(1767.71,2122.05) ; 1352.36,2504.92 1710.63,2504.92 1699.8,2515.75 ; v1(1433.07,2102.36) 1691.46,2102.36 1751.15,2162.05 1784.28,2162.05 1804.6,2141.73 v1(1964.57,2141.73) ; v1(1590.55,1787.4) 1666.81,1787.4 1905.51,1548.69 v2(1905.51,1433.07) ; 1678.15,1494.09 1841.92,1494.09 1846.46,1498.63 v1(1846.46,1551.18) ; v1(1708.66,1374.02) 2344.69,1374.02 2580.91,1610.24 v1(2811.02,1610.24) ; v1(1826.77,2594.49) 1846.46,2594.49 1964.57,2476.38 v1(1964.57,2417.32) ; 3205.12,2675.2 3226.77,2653.54 ; v1@3401.57,2260.39 v1(3401.57,2279.53) 3480.32,2200.78 3480.32,2123.58 3500,2103.9 3647.37,2103.9 3648.91,2102.36 3786.42,2102.36 3863.19,2179.13 ; v1(3480.31,1531.49) 3508.86,1531.49 3548.23,1492.13 ; 3548.23,1135.83 3548.23,1492.13 ; 3548.23,1494.09 3548.23,1492.13 ; 3548.23,2198.82 3548.23,2229.33 3598.43,2279.53 3598.43,2437.01 3567.91,2467.52 3567.91,2537.4 3580.71,2537.4 v2(3618.11,2574.8) ; 3607.28,1667.32 3607.28,2025.59 ; v1(3677.17,1590.55) 3677.17,1628.5 3813.67,1765 3962.36,1765 4020.67,1706.69 ; 3863.19,2189.44 3863.19,2537.4 ; 4040.35,1667.32 4040.35,2025.59
  Bottom Layer w20: v1(1078.74,1984.25) v1(1078.74,2338.58) ; 1159.45,1629.92 1159.45,1585.72 1184,1561.17 1285.57,1561.17 v1(1314.96,1590.55) v1(1314.96,1728.35) ; v1(1413.38,2417.32) 1413.38,2397.64 1492.13,2318.9 ; 2005.12,2692.91 2010.43,2698.23 ; v1(2988.19,1374.02) v1(2988.18,1511.81) ; 3105.12,2698.23 3105.12,2675.2 3105.12,2477.56 v1(3125.98,2456.69) ; 3657.48,1414.96 3754.33,1414.96 3852.76,1316.54
  other v1: 1440,1118.11 1536,1118.11 1649.61,1160 1332.68,1306.1 1255.91,1334.65 1216.54,2122.05 3972.43,2515.74

## Keep-outs
Keep-Out Layer:
  the board outline again, w5

## Silkscreen, mask and mechanical layers (free items; w line width, h text height)
Top Overlay:
  lines w10: 1334.65,1944.88 1354.33,1964.57 1649.61,1964.57
  text "Shiyu Zhang" at 1216.54,2673.23 h36
  text "Meme Console" at 2200.79,2673.23 h36
  text "683557" at 3539.37,2673.23 h36
Bottom Overlay:
  text "Shiyu Zhang" at 1570.87,2673.23 h36
  text "683557" at 4051.18,2673.23 h36
Mechanical 1:
  lines w5: 1000,1000 1000,2732.28 4090.55,2732.28 4090.55,1000 1000,1000
  lines w10: 1000,1000 4090.55,1000 4090.55,2732.28 1000,2732.28 1000,1000

## Text inside footprints (layer, text, board x,y; h text height)
BT1: Top Overlay "-" at 3696.85,2338.58 h36 r180; Top Overlay "+" at 1354.33,2633.86 h36 r180